# Altium PCB PCB1.PcbDoc
Units mil, origin at the board's own origin, x right, y up, seen from the top; angles counter-clockwise.
Board outline 4001.92 x 2495 mil, 2 copper layers (Top Layer, Bottom Layer); 22 components, 41 nets, 120 pads, 943 vias.
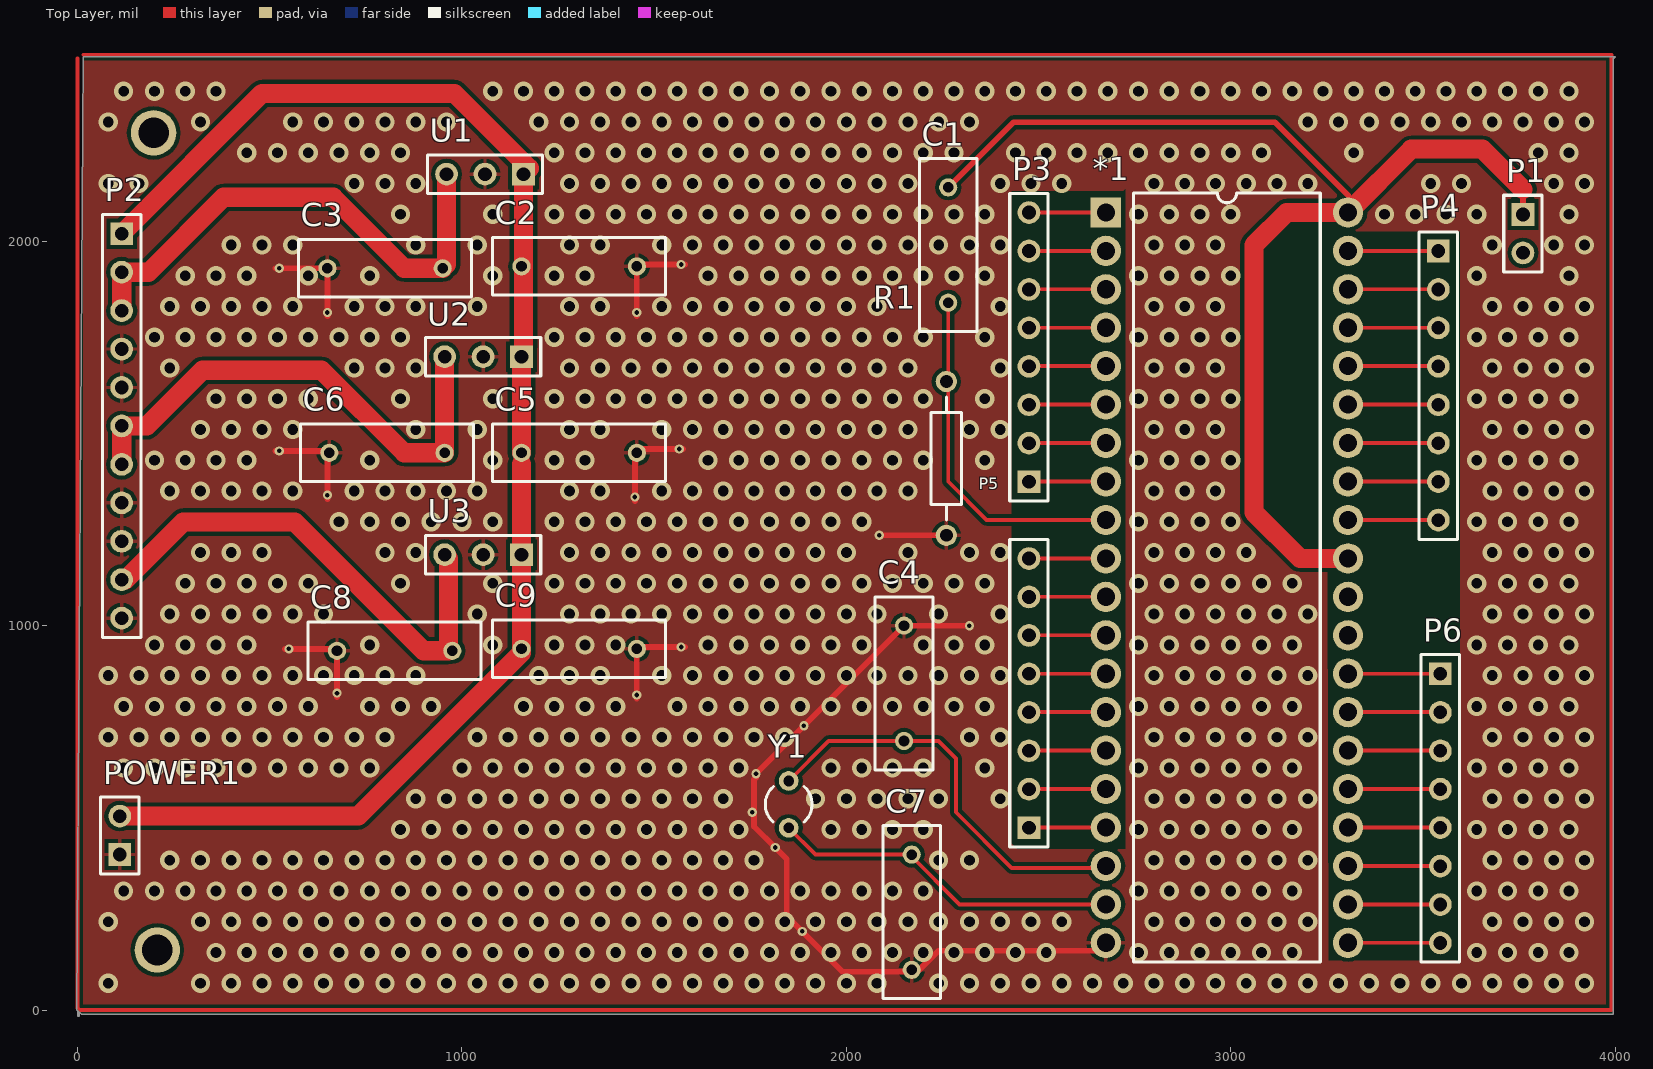
[diagram p0: Top Layer view]
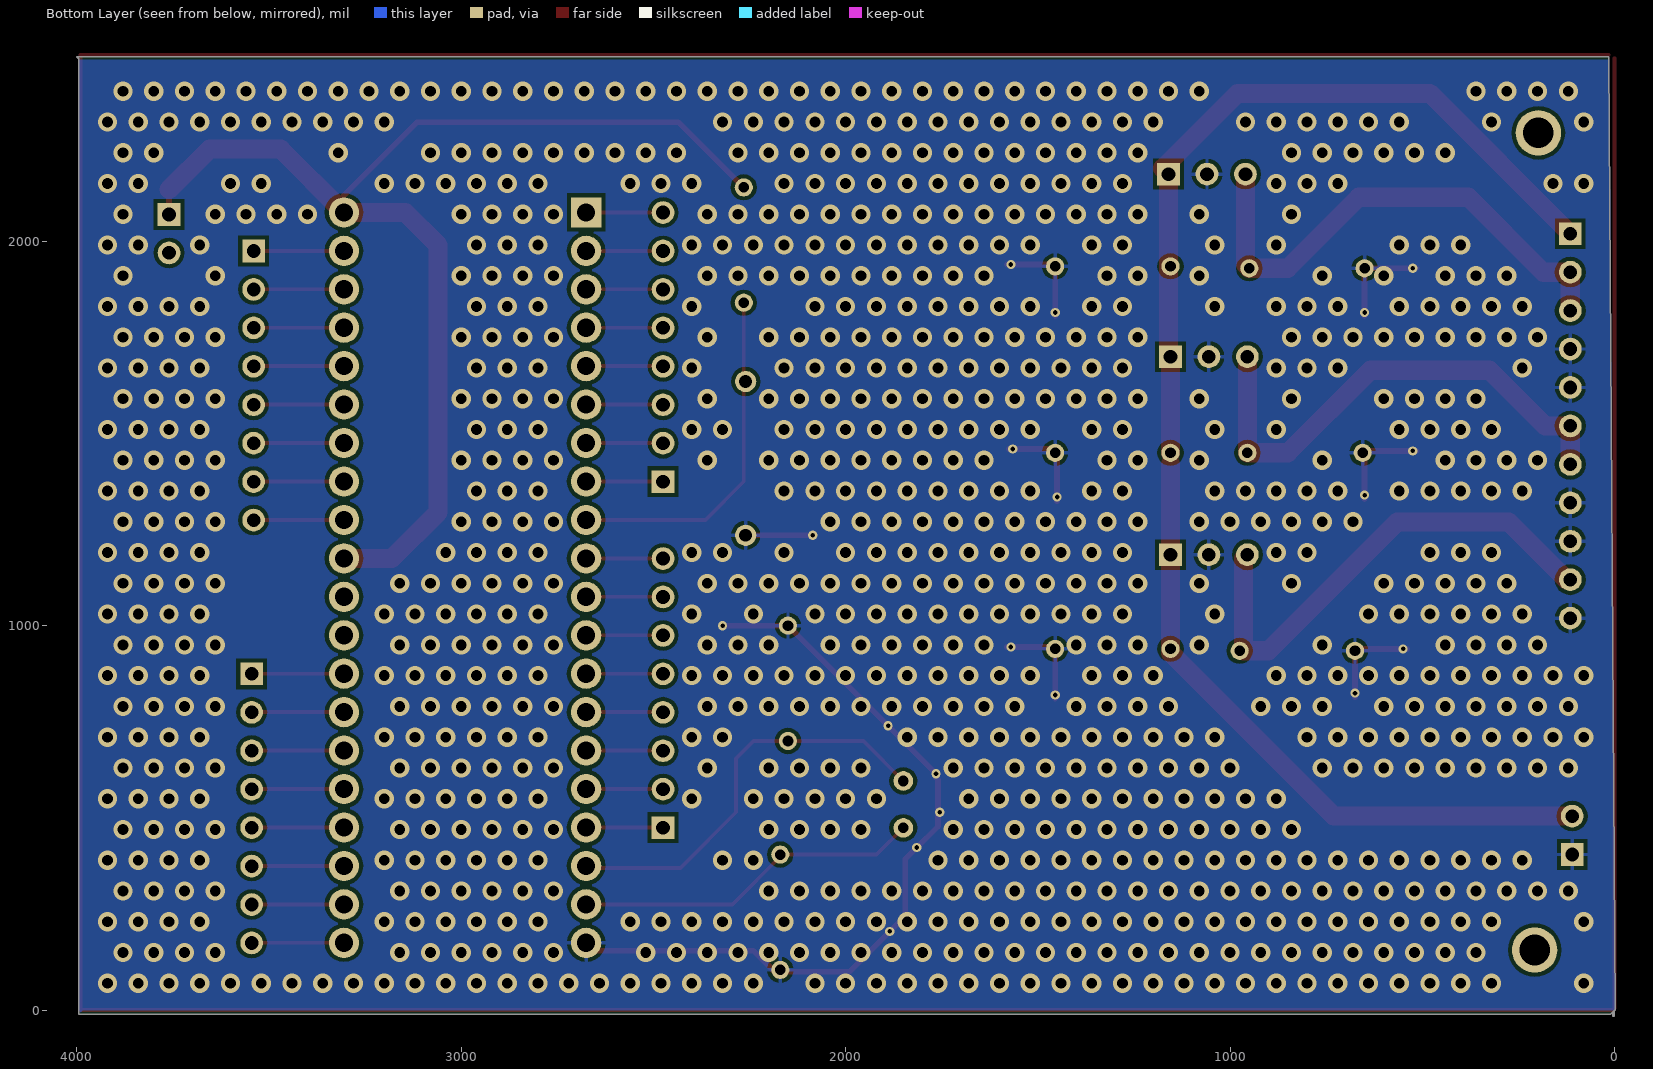
[diagram p1: Bottom Layer view, seen from below]

## Layer stack, top to bottom
Top Solder: solder mask 0.4, Solder Resist, Dk 3.5
Top Layer: signal copper 1.4
Dielectric 1: dielectric 12.6, FR-4, Dk 4.8
Bottom Layer: signal copper 1.4
Bottom Solder: solder mask 0.4, Solder Resist, Dk 3.5

## Board outline
15,2480 4000,2480 3995,2475 3995,-10 10,-10 0,0 5,-5 5,-15 0,-15 0,-1.12 -1.92,0.79
board region "Layer Stack Region 1": 0,-14.62 0,-1.12 -1.92,0.79 15,2480 4000,2480 3995,2475 3995,-10 10,-10 0,0 5,-5 5,-14.62
board region "Layer Stack Region 1": 5,-14.62 5,-15 0,-15 0,-14.62

## Design rules (kind name [scope] priority, off if disabled: settings)
Clearance [All] p1: gap=10
PolygonConnect PolygonConnect_1 [IsVia] p1: connectstyle=Direct reliefconductorwidth=10 reliefentries=4 polygonreliefangle="90 Angle" airgapwidth=10
PolygonConnect [All] p2: connectstyle=Relief reliefconductorwidth=10 reliefentries=4 polygonreliefangle="90 Angle" airgapwidth=10
RoutingVias [All] p1: holewidth=28 width=50 viastyle="Through Hole" minholewidth=28 minwidth=50 maxholewidth=28 maxwidth=50
SilkToSolderMaskClearance [IsPad] p1: minsilkscreentomaskgap=0 clearancetoexposedcopper=TRUE
SolderMaskExpansion [All] p1: expansion=4
Width POWER [InNetClass('POWER')] p1: maxlimit=60 minlimit=15 preferedwidth=20
Width [All] p2: maxlimit=10 minlimit=10 preferedwidth=10
29 further rules are at their usual default settings.

## Classes and differential pairs
net class POWER: 5V1 5V2 6V GND NetC2_2 VCC

## Components (designator, comment, footprint, x,y, rotation, side; value= is the part's Value field where it differs from the comment)
*1 "89C51" 98C52 2675,2075.43 r0 top
C1 "" RAD-0.3 2265,1990.43 r90 top
C2 "Cap" RAD-0.3 1305,1935 r180 top
C3 "Cap" RAD-0.3 800,1930 r0 top
C4 "" RAD-0.3 2150,850.43 r90 top
C5 "Cap" RAD-0.3 1305,1450 r180 top
C6 "Cap" RAD-0.3 805,1450 r0 top
C7 "" RAD-0.3 2170,255 r270 top
C8 "Cap" RAD-0.3 825,935 r0 top
C9 "Cap" RAD-0.3 1305,940 r180 top
P1 "Header 2" HDR1X2 3760,2070 r270 top
P2 "Header 11" HDR1X11 115,2020 r270 top
P3 "Header 8" HDR1X8 2475,1375 r90 top
P4 "Header 8" HDR1X8 3540,1975 r270 top
P5 "Header 8" HDR1X8 2475,475 r90 top
P6 "Header 8" HDR1X8 3545,875 r270 top
POWER1 "Header 2" HDR1X2 110,405 r90 top
R1 "Res2" AXIAL-0.4 2260,1435.43 r90 top
U1 "Component_1" HDR1X3 1160,2175 r180 top
U2 "Component_1" HDR1X3 1155,1700 r180 top
U3 "Component_1" HDR1X3 1155,1185 r180 top
Y1 "XTAL" R38 1850,535.43 r180 top

## Footprints (in the part's own frame and the unit in brackets; to place one, negate y for a bottom-side part, rotate by r counter-clockwise, add the part's x,y. Pads: shape width x height; smd on the part's side, far side on the other; paste and mask are expansions set on the pad)
98C52 [mm]
  rect 2x2 hole 1.2: 1(0,0)
  round 2 hole 1.2: 2(0,-2.54) 3(0,-5.08) 4(0,-7.62) 5(0,-10.16) 6(0,-12.7) 7(0,-15.24) 8(0,-17.78) 9(0,-20.32) 10(0,-22.86) 11(0,-25.4) 12(0,-27.94) 13(0,-30.48) 14(0,-33.02) 15(0,-35.56) 16(0,-38.1) 17(0,-40.64) 18(0,-43.18) 19(0,-45.72) 20(0,-48.26) 21(16,-48.26) 22(16,-45.72) 23(16,-43.18) 24(16,-40.64) 25(16,-38.1) 26(16,-35.56) 27(16,-33.02) 28(16,-30.48) 29(16,-27.94) 30(16,-25.4) 31(16,-22.86) 32(16,-20.32) 33(16,-17.78) 34(16,-15.24) 35(16,-12.7) 36(16,-10.16) 37(16,-7.62) 38(16,-5.08) 39(16,-2.54) 40(16,0)
  silkscreen extent 1.83,-49.53 14.17,1.27, body extent 1.9,-49.4 14.48,1.29, height 1
AXIAL-0.4 [mm] "Axial Device, Thru-Hole; 2 Leads; 0.4 in Pin Spacing"
  round 1.4 hole 0.85: 1(-5.08,0) 2(5.08,0)
  silkscreen extent -4.06,-1.02 4.06,1.02
HDR1X2 [mm] "Connector; Header; 2 Position"
  rect 1.5x1.5 hole 0.9: 1(0,0)
  round 1.5 hole 0.9: 2(2.54,0)
  silkscreen extent -1.27,-1.27 3.81,1.27
HDR1X3 [mm] "Connector; Header; 3 Position"
  rect 1.5x1.5 hole 0.9: 1(0,0)
  round 1.5 hole 0.9: 2(2.54,0) 3(5.08,0)
  silkscreen extent -1.27,-1.27 6.35,1.27
HDR1X8 [mm] "Connector; Header; 8 Position"
  rect 1.5x1.5 hole 0.9: 1(0,0)
  round 1.5 hole 0.9: 2(2.54,0) 3(5.08,0) 4(7.62,0) 5(10.16,0) 6(12.7,0) 7(15.24,0) 8(17.78,0)
  silkscreen extent -1.27,-1.27 19.05,1.27
HDR1X11 [mm] "Connector; Header; 11 Position"
  rect 1.5x1.5 hole 0.9: 1(0,0)
  round 1.5 hole 0.9: 2(2.54,0) 3(5.08,0) 4(7.62,0) 5(10.16,0) 6(12.7,0) 7(15.24,0) 8(17.78,0) 9(20.32,0) 10(22.86,0) 11(25.4,0)
  silkscreen extent -1.27,-1.27 26.67,1.27
R38 [mm] "Crystal, Thru-Hole; 2 Leads; Body 3.1 x 8.2 mm (Dia.xH)"
  round 1.3 hole 0.7: 1(0,1.55) 2(0,-1.55)
  silkscreen extent -1.55,-1.19 1.55,1.17
RAD-0.3 [mm] "Radial Cap, Thru-Hole; 2 Leads; 0.3 in Pin Spacing"
  round 1.2 hole 0.7: 1(-3.81,0) 2(3.81,0)
  silkscreen extent -5.71,-1.91 5.71,1.91

## Part data
*1: library part 85C51
C1 C4 C7: library part Cap, "Capacitor"
C2 C3 C5 C6 C8 C9: "Capacitor"
P1 POWER1: "Header, 2-Pin"
P2: "Header, 11-Pin"
P3 P4 P5 P6: "Header, 8-Pin"
R1: "Resistor"
Y1: "Crystal Oscillator"

## Free pads (board coordinates)
  round 118.11 hole 80: 0(198.11,2282.32) 0(207.54,156.63)

## Via types
v1: diameter 50, hole 28, Top Layer to Bottom Layer, 924 vias
v2: diameter 24, hole 12, Top Layer to Bottom Layer, 14 vias
v3: diameter 24, hole 12, Top Layer to Bottom Layer, tented both sides, 5 vias

## Nets (pads, with @x,y where several pads share a name; then routed paths per layer and width w, separated by ;. In a path a pad name is that pad's centre, name@x,y a point inside that pad or via, vN(x,y) a via of type N, cw(c..) or ccw(c..) an arc to the next point about the centre after c; other vN are vias at no path point)
5V1: C3.2 P2.2 P2.3 U1.3 | length 1327.4
  Top Layer w50: P2.3 P2.2 185,1920 380,2115 665,2115 850,1930 C3.2 ; C3.2@960,1940 U1.3
5V2: C6.2 P2.6 P2.7 U2.3 | length 1339.1
  Top Layer w50: P2.7 P2.6 180,1520 325,1665 635,1665 850,1450 C6.2 U2.3
6V: C8.2 P2.10 U3.3 | length 1305
  Top Layer w50: P2.10 125,1120 275,1270 565,1270 900,935 965,935 965,1175 U3.3
GND: *1.20 C2.1 C3.1 C4.2 C5.1 C6.1 C7.2 C8.1 C9.1 P2.4 P2.5 P2.8 P2.9 P2.11 POWER1.1 R1.1 U1.2 U2.2 U3.2 | length 3689
  Top Layer w15: v2@515,1455 v2(525,1455) C6.1@640,1455 ; v2@515,1930 v2(525,1930) C3.1@640,1930 ; v2@540,940 v2(550,940) C8.1@665,940 ; v2@650,1330 v2(650,1340) C6.1@650,1455 ; v2@650,1805 v2(650,1815) C3.1 ; v2@675,815 v2(675,825) C8.1 C8.1@675,940 ; v2@1450,1325 v2(1450,1335) C5.1@1450,1450 ; C5.1@1450,1460 v2(1565,1460) v2@1575,1460 ; v2@1455,810 v2(1455,820) C9.1@1455,935 ; C9.1@1455,945 v2(1570,945) v2@1580,945 ; v2@1455,1805 v2(1455,1815) C2.1@1455,1930 ; C2.1@1455,1940 v2(1570,1940) v2@1580,1940 ; v2(2085.43,1235.43) R1.1 ; v3(2320,1000) 2149.57,1000 v3(1889.57,740) v3(1765,615.43) 1765,605 1760,600 1760,478.22 v2(1815,423.22) 1845,393.22 1845,245 v3(1885,205) 1990,100 2184.57,100 2239.57,155 *1.20@2654.57,155
  other v1: 80,70.43 320,70.43 400,70.43 480,70.43 560,70.43 640,70.43 720,70.43 800,70.43 880,70.43 960,70.43 1040,70.43 1120,70.43 1200,70.43 1280,70.43 1360,70.43 1440,70.43 1520,70.43 1600,70.43 1680,70.43 1760,70.43 1840,70.43 1920,70.43 2000,70.43 2080,70.43 2240,70.43 2320,70.43 2400,70.43 2480,70.43 2560,70.43 2640,70.43 2720,70.43 2800,70.43 2880,70.43 2960,70.43 3040,70.43 3120,70.43 3200,70.43 3280,70.43 3360,70.43 3440,70.43 3520,70.43 3600,70.43 3680,70.43 3760,70.43 3840,70.43 3920,70.43 360,150.43 440,150.43 520,150.43 600,150.43 680,150.43 760,150.43 840,150.43 920,150.43 1000,150.43 1080,150.43 1160,150.43 1240,150.43 1320,150.43 1400,150.43 1480,150.43 1560,150.43 1640,150.43 1720,150.43 1800,150.43 1880,150.43 1960,150.43 2040,150.43 2120,150.43 2200,150.43 2280,150.43 2360,150.43 2440,150.43 2520,150.43 2760,150.43 2840,150.43 2920,150.43 3000,150.43 3080,150.43 3160,150.43 3640,150.43 3720,150.43 3800,150.43 3880,150.43 80,230.43 320,230.43 400,230.43 480,230.43 560,230.43 640,230.43 720,230.43 800,230.43 880,230.43 960,230.43 1040,230.43 1120,230.43 1200,230.43 1280,230.43 1360,230.43 1440,230.43 1520,230.43 1600,230.43 1680,230.43 1760,230.43 1840,230.43 1920,230.43 2000,230.43 2080,230.43 2160,230.43 2240,230.43 2320,230.43 2400,230.43 2480,230.43 2560,230.43 2800,230.43 2880,230.43 2960,230.43 3040,230.43 3120,230.43 3200,230.43 3680,230.43 3760,230.43 3840,230.43 3920,230.43 120,310.43 200,310.43 280,310.43 360,310.43 440,310.43 520,310.43 600,310.43 680,310.43 760,310.43 840,310.43 920,310.43 1000,310.43 1080,310.43 1160,310.43 1240,310.43 1320,310.43 1400,310.43 1480,310.43 1560,310.43 1640,310.43 1720,310.43 1800,310.43 1880,310.43 1960,310.43 2040,310.43 2120,310.43 2200,310.43 2760,310.43 2840,310.43 2920,310.43 3000,310.43 3080,310.43 3160,310.43 3640,310.43 3720,310.43 3800,310.43 3880,310.43 240,390.43 320,390.43 400,390.43 480,390.43 560,390.43 640,390.43 720,390.43 800,390.43 880,390.43 960,390.43 1040,390.43 1120,390.43 1200,390.43 1280,390.43 1360,390.43 1440,390.43 1520,390.43 1600,390.43 1680,390.43 1760,390.43 2240,390.43 2320,390.43 2800,390.43 2880,390.43 2960,390.43 3040,390.43 3120,390.43 3200,390.43 3680,390.43 3760,390.43 3840,390.43 3920,390.43 840,470.43 920,470.43 1000,470.43 1080,470.43 1160,470.43 1240,470.43 1320,470.43 1400,470.43 1480,470.43 1560,470.43 1640,470.43 1720,470.43 1960,470.43 2040,470.43 2120,470.43 2200,470.43 2760,470.43 2840,470.43 2920,470.43 3000,470.43 3080,470.43 3160,470.43 3640,470.43 3720,470.43 3800,470.43 3880,470.43 880,550.43 960,550.43 1040,550.43 1120,550.43 1200,550.43 1280,550.43 1360,550.43 1440,550.43 1520,550.43 1600,550.43 1680,550.43 1920,550.43 2000,550.43 2080,550.43 2160,550.43 2240,550.43 2400,550.43 2800,550.43 2880,550.43 2960,550.43 3040,550.43 3120,550.43 3200,550.43 3680,550.43 3760,550.43 3840,550.43 3920,550.43 120,630.43 200,630.43 280,630.43 360,630.43 440,630.43 520,630.43 600,630.43 680,630.43 760,630.43 1000,630.43 1080,630.43 1160,630.43 1240,630.43 1320,630.43 1400,630.43 1480,630.43 1560,630.43 1640,630.43 1720,630.43 1960,630.43 2040,630.43 2120,630.43 2200,630.43 2360,630.43 2760,630.43 2840,630.43 2920,630.43 3000,630.43 3080,630.43 3160,630.43 3640,630.43 3720,630.43 3800,630.43 3880,630.43 80,710.43 160,710.43 240,710.43 320,710.43 400,710.43 480,710.43 560,710.43 640,710.43 720,710.43 800,710.43 1040,710.43 1120,710.43 1200,710.43 1280,710.43 1360,710.43 1440,710.43 1520,710.43 1600,710.43 1680,710.43 1760,710.43 1840,710.43 2320,710.43 2400,710.43 2800,710.43 2880,710.43 2960,710.43 3040,710.43 3120,710.43 3200,710.43 3680,710.43 3760,710.43 3840,710.43 3920,710.43 120,790.43 200,790.43 280,790.43 360,790.43 440,790.43 520,790.43 600,790.43 760,790.43 840,790.43 920,790.43 1160,790.43 1240,790.43 1320,790.43 1400,790.43 1560,790.43 1640,790.43 1720,790.43 1800,790.43 1880,790.43 1960,790.43 2040,790.43 2120,790.43 2200,790.43 2280,790.43 2360,790.43 2760,790.43 2840,790.43 2920,790.43 3000,790.43 3080,790.43 3160,790.43 3640,790.43 3720,790.43 3800,790.43 3880,790.43 80,870.43 160,870.43 240,870.43 320,870.43 400,870.43 480,870.43 560,870.43 640,870.43 720,870.43 800,870.43 880,870.43 1200,870.43 1280,870.43 1360,870.43 1520,870.43 1600,870.43 1680,870.43 1760,870.43 1840,870.43 1920,870.43 2000,870.43 2080,870.43 2160,870.43 2240,870.43 2320,870.43 2400,870.43 2800,870.43 2880,870.43 2960,870.43 3040,870.43 3120,870.43 3200,870.43 3680,870.43 3760,870.43 3840,870.43 3920,870.43 200,950.43 280,950.43 360,950.43 440,950.43 760,950.43 1080,950.43 1240,950.43 1320,950.43 1400,950.43 1640,950.43 1720,950.43 1800,950.43 1880,950.43 1960,950.43 2040,950.43 2200,950.43 2280,950.43 2360,950.43 2760,950.43 2840,950.43 2920,950.43 3000,950.43 3080,950.43 3160,950.43 3640,950.43 3720,950.43 3800,950.43 3880,950.43 240,1030.43 320,1030.43 400,1030.43 480,1030.43 560,1030.43 640,1030.43 1040,1030.43 1280,1030.43 1360,1030.43 1440,1030.43 1520,1030.43 1600,1030.43 1680,1030.43 1760,1030.43 1840,1030.43 1920,1030.43 2000,1030.43 2080,1030.43 2240,1030.43 2400,1030.43 2800,1030.43 2880,1030.43 2960,1030.43 3040,1030.43 3120,1030.43 3200,1030.43 3680,1030.43 3760,1030.43 3840,1030.43 3920,1030.43 280,1110.43 360,1110.43 440,1110.43 520,1110.43 600,1110.43 840,1110.43 1080,1110.43 1240,1110.43 1320,1110.43 1400,1110.43 1480,1110.43 1560,1110.43 1640,1110.43 1720,1110.43 1800,1110.43 1880,1110.43 1960,1110.43 2040,1110.43 2120,1110.43 2200,1110.43 2280,1110.43 2360,1110.43 2760,1110.43 2840,1110.43 2920,1110.43 3000,1110.43 3080,1110.43 3160,1110.43 3640,1110.43 3720,1110.43 3800,1110.43 3880,1110.43 320,1190.43 400,1190.43 480,1190.43 800,1190.43 880,1190.43 1280,1190.43 1360,1190.43 1440,1190.43 1520,1190.43 1600,1190.43 1680,1190.43 1760,1190.43 1840,1190.43 1920,1190.43 2000,1190.43 2160,1190.43 2320,1190.43 2400,1190.43 2800,1190.43 2880,1190.43 2960,1190.43 3040,1190.43 3680,1190.43 3760,1190.43 3840,1190.43 3920,1190.43 680,1270.43 760,1270.43 840,1270.43 920,1270.43 1000,1270.43 1080,1270.43 1240,1270.43 1320,1270.43 1400,1270.43 1480,1270.43 1560,1270.43 1640,1270.43 1720,1270.43 1800,1270.43 1880,1270.43 1960,1270.43 2040,1270.43 2760,1270.43 2840,1270.43 2920,1270.43 3000,1270.43 3640,1270.43 3720,1270.43 3800,1270.43 3880,1270.43 240,1350.43 320,1350.43 400,1350.43 480,1350.43 560,1350.43 720,1350.43 800,1350.43 880,1350.43 960,1350.43 1040,1350.43 1280,1350.43 1360,1350.43 1520,1350.43 1600,1350.43 1680,1350.43 1760,1350.43 1840,1350.43 1920,1350.43 2000,1350.43 2080,1350.43 2160,1350.43 2800,1350.43 2880,1350.43 2960,1350.43 3680,1350.43 3760,1350.43 3840,1350.43 3920,1350.43 200,1430.43 280,1430.43 360,1430.43 440,1430.43 760,1430.43 1080,1430.43 1240,1430.43 1320,1430.43 1640,1430.43 1720,1430.43 1800,1430.43 1880,1430.43 1960,1430.43 2040,1430.43 2120,1430.43 2200,1430.43 2360,1430.43 2760,1430.43 2840,1430.43 2920,1430.43 3000,1430.43 3640,1430.43 3720,1430.43 3800,1430.43 3880,1430.43 320,1510.43 400,1510.43 480,1510.43 560,1510.43 880,1510.43 1040,1510.43 1280,1510.43 1360,1510.43 1520,1510.43 1600,1510.43 1680,1510.43 1760,1510.43 1840,1510.43 1920,1510.43 2000,1510.43 2080,1510.43 2160,1510.43 2320,1510.43 2400,1510.43 2800,1510.43 2880,1510.43 2960,1510.43 3680,1510.43 3760,1510.43 3840,1510.43 3920,1510.43 360,1590.43 440,1590.43 520,1590.43 600,1590.43 840,1590.43 1080,1590.43 1240,1590.43 1320,1590.43 1400,1590.43 1480,1590.43 1560,1590.43 1640,1590.43 1720,1590.43 1800,1590.43 1880,1590.43 1960,1590.43 2040,1590.43 2120,1590.43 2200,1590.43 2360,1590.43 2760,1590.43 2840,1590.43 2920,1590.43 3000,1590.43 3640,1590.43 3720,1590.43 3800,1590.43 3880,1590.43 240,1670.43 720,1670.43 800,1670.43 880,1670.43 1280,1670.43 1360,1670.43 1440,1670.43 1520,1670.43 1600,1670.43 1680,1670.43 1760,1670.43 1840,1670.43 1920,1670.43 2000,1670.43 2080,1670.43 2160,1670.43 2400,1670.43 2800,1670.43 2880,1670.43 2960,1670.43 3680,1670.43 3760,1670.43 3840,1670.43 3920,1670.43 200,1750.43 280,1750.43 360,1750.43 440,1750.43 520,1750.43 600,1750.43 680,1750.43 760,1750.43 840,1750.43 1240,1750.43 1320,1750.43 1400,1750.43 1480,1750.43 1560,1750.43 1640,1750.43 1720,1750.43 1800,1750.43 1880,1750.43 1960,1750.43 2040,1750.43 2120,1750.43 2200,1750.43 2360,1750.43 2760,1750.43 2840,1750.43 2920,1750.43 3000,1750.43 3640,1750.43 3720,1750.43 3800,1750.43 3880,1750.43 240,1830.43 320,1830.43 400,1830.43 480,1830.43 560,1830.43 720,1830.43 800,1830.43 880,1830.43 1040,1830.43 1280,1830.43 1360,1830.43 1520,1830.43 1600,1830.43 1680,1830.43 1760,1830.43 1840,1830.43 1920,1830.43 2000,1830.43 2080,1830.43 2400,1830.43 2800,1830.43 2880,1830.43 2960,1830.43 3680,1830.43 3760,1830.43 3840,1830.43 3920,1830.43 280,1910.43 360,1910.43 440,1910.43 600,1910.43 760,1910.43 1080,1910.43 1240,1910.43 1320,1910.43 1640,1910.43 1720,1910.43 1800,1910.43 1880,1910.43 1960,1910.43 2040,1910.43 2120,1910.43 2200,1910.43 2280,1910.43 2360,1910.43 2760,1910.43 2840,1910.43 2920,1910.43 3000,1910.43 3640,1910.43 3880,1910.43 400,1990.43 480,1990.43 560,1990.43 880,1990.43 1040,1990.43 1280,1990.43 1360,1990.43 1520,1990.43 1600,1990.43 1680,1990.43 1760,1990.43 1840,1990.43 1920,1990.43 2000,1990.43 2080,1990.43 2160,1990.43 2240,1990.43 2320,1990.43 2400,1990.43 2800,1990.43 2880,1990.43 2960,1990.43 3680,1990.43 3840,1990.43 3920,1990.43 840,2070.43 1080,2070.43 1240,2070.43 1320,2070.43 1400,2070.43 1480,2070.43 1560,2070.43 1640,2070.43 1720,2070.43 1800,2070.43 1880,2070.43 1960,2070.43 2040,2070.43 2120,2070.43 2200,2070.43 2280,2070.43 2360,2070.43 2760,2070.43 2840,2070.43 2920,2070.43 3000,2070.43 3400,2070.43 3480,2070.43 3560,2070.43 3640,2070.43 3880,2070.43 80,2150.43 160,2150.43 720,2150.43 800,2150.43 880,2150.43 1280,2150.43 1360,2150.43 1440,2150.43 1520,2150.43 1600,2150.43 1680,2150.43 1760,2150.43 1840,2150.43 1920,2150.43 2000,2150.43 2080,2150.43 2160,2150.43 2400,2150.43 2480,2150.43 2560,2150.43 2800,2150.43 2880,2150.43 2960,2150.43 3040,2150.43 3120,2150.43 3200,2150.43 3520,2150.43 3600,2150.43 3840,2150.43 3920,2150.43 440,2230.43 520,2230.43 600,2230.43 680,2230.43 760,2230.43 840,2230.43 1240,2230.43 1320,2230.43 1400,2230.43 1480,2230.43 1560,2230.43 1640,2230.43 1720,2230.43 1800,2230.43 1880,2230.43 1960,2230.43 2040,2230.43 2120,2230.43 2200,2230.43 2280,2230.43 2440,2230.43 2520,2230.43 2600,2230.43 2680,2230.43 2760,2230.43 2840,2230.43 2920,2230.43 3000,2230.43 3080,2230.43 3320,2230.43 3800,2230.43 3880,2230.43 80,2310.43 320,2310.43 560,2310.43 640,2310.43 720,2310.43 800,2310.43 880,2310.43 960,2310.43 1200,2310.43 1280,2310.43 1360,2310.43 1440,2310.43 1520,2310.43 1600,2310.43 1680,2310.43 1760,2310.43 1840,2310.43 1920,2310.43 2000,2310.43 2080,2310.43 2160,2310.43 2240,2310.43 2320,2310.43 3200,2310.43 3280,2310.43 3360,2310.43 3440,2310.43 3520,2310.43 3600,2310.43 3680,2310.43 3760,2310.43 3840,2310.43 3920,2310.43 120,2390.43 200,2390.43 280,2390.43 360,2390.43 1080,2390.43 1160,2390.43 1240,2390.43 1320,2390.43 1400,2390.43 1480,2390.43 1560,2390.43 1640,2390.43 1720,2390.43 1800,2390.43 1880,2390.43 1960,2390.43 2040,2390.43 2120,2390.43 2200,2390.43 2280,2390.43 2360,2390.43 2440,2390.43 2520,2390.43 2600,2390.43 2680,2390.43 2760,2390.43 2840,2390.43 2920,2390.43 3000,2390.43 3080,2390.43 3160,2390.43 3240,2390.43 3320,2390.43 3400,2390.43 3480,2390.43 3560,2390.43 3640,2390.43 3720,2390.43 3800,2390.43 3880,2390.43
  other v3: 1755,515
Net*1_1: *1.1 P3.8 | length 199.6
  Top Layer w10: P3.8@2475.43,2075.43 *1.1
Net*1_2: *1.2 P3.7 | length 200.2
  Top Layer w10: P3.7 2475.43,1975.43 *1.2
Net*1_3: *1.3 P3.6 | length 199.6
  Top Layer w10: P3.6@2475.43,1875.43 *1.3
Net*1_4: *1.4 P3.5 | length 204.6
  Top Layer w10: P3.5@2475.43,1775.43 *1.4
  Bottom Layer w10: P3.5@2485,1770.43 P3.5@2485,1775.43
Net*1_5: *1.5 P3.4 | length 199.6
  Top Layer w10: P3.4@2475.43,1675.43 *1.5
Net*1_6: *1.6 P3.3 | length 204.6
  Top Layer w10: P3.3@2475.43,1575.43 *1.6
  Bottom Layer w10: P3.3@2485,1570.43 P3.3@2485,1575.43
Net*1_7: *1.7 P3.2 | length 206.6
  Top Layer w10: P3.2@2475.43,1475.43 *1.7
  Bottom Layer w10: *1.7@2670,1470.43 *1.7
Net*1_8: *1.8 P3.1 | length 199.6
  Top Layer w10: P3.1@2475.43,1375.43 *1.8
Net*1_9: *1.9 C1.1 R1.2 | length 916.7
  Top Layer w10: C1.1 2265,1375 2364.57,1275.43 *1.9
Net*1_10: *1.10 P5.8 | length 199.6
  Top Layer w10: P5.8@2475.43,1175.43 *1.10
Net*1_11: *1.11 P5.7 | length 199.6
  Top Layer w10: P5.7@2475.43,1075.43 *1.11
Net*1_12: *1.12 P5.6 | length 204.6
  Top Layer w10: P5.6@2475.43,975.43 *1.12
  Bottom Layer w10: P5.6@2475,970.43 P5.6@2475,975.43
Net*1_13: *1.13 P5.5 | length 199.6
  Top Layer w10: P5.5@2475.43,875.43 *1.13
Net*1_14: *1.14 P5.4 | length 199.6
  Top Layer w10: P5.4@2475.43,775.43 *1.14
Net*1_15: *1.15 P5.3 | length 204.6
  Top Layer w10: P5.3@2475.43,675.43 *1.15
  Bottom Layer w10: P5.3@2475,670.43 P5.3@2475,675.43
Net*1_16: *1.16 P5.2 | length 199.6
  Top Layer w10: P5.2@2475.43,575.43 *1.16
Net*1_17: *1.17 P5.1 | length 206.6
  Top Layer w10: P5.1@2475.43,475.43 *1.17
  Bottom Layer w10: *1.17@2670,470.43 *1.17
Net*1_18: *1.18 C4.1 Y1.2 | length 1089.2
  Top Layer w10: Y1.2 1953.98,700.43 C4.1 2239.57,700.43 2285,655 2285,515 2430,370 2669.57,370 *1.18
Net*1_19: *1.19 C7.1 Y1.1 | length 907.4
  Top Layer w10: Y1.1 1919.4,405 2165,405 2294.57,275.43 *1.19
Net*1_21: *1.21 P6.8 | length 239.6
  Top Layer w10: *1.21 P6.8@3544.57,175.43
Net*1_22: *1.22 P6.7 | length 239.6
  Top Layer w10: *1.22 P6.7@3544.57,275.43
Net*1_23: *1.23 P6.6 | length 239.6
  Top Layer w10: *1.23 P6.6@3544.57,375.43
Net*1_24: *1.24 P6.5 | length 239.6
  Top Layer w10: *1.24 P6.5@3544.57,475.43
Net*1_25: *1.25 P6.4 | length 239.6
  Top Layer w10: *1.25 P6.4@3544.57,575.43
Net*1_26: *1.26 P6.3 | length 239.6
  Top Layer w10: *1.26 P6.3@3544.57,675.43
Net*1_27: *1.27 P6.2 | length 239.6
  Top Layer w10: *1.27 P6.2@3544.57,775.43
Net*1_28: *1.28 P6.1 | length 239.6
  Top Layer w10: *1.28 P6.1@3544.57,875.43
Net*1_32: *1.32 P4.8 | length 234.6
  Top Layer w10: *1.32 P4.8@3539.57,1275.43
Net*1_33: *1.33 P4.7 | length 234.6
  Top Layer w10: *1.33 P4.7@3539.57,1375.43
Net*1_34: *1.34 P4.6 | length 234.6
  Top Layer w10: *1.34 P4.6@3539.57,1475.43
Net*1_35: *1.35 P4.5 | length 235.3
  Top Layer w10: *1.35 3539.57,1575.43 P4.5
Net*1_36: *1.36 P4.4 | length 234.6
  Top Layer w10: *1.36 P4.4@3539.57,1675.43
Net*1_37: *1.37 P4.3 | length 234.6
  Top Layer w10: *1.37 P4.3@3539.57,1775.43
Net*1_38: *1.38 P4.2 | length 248.8
  Top Layer w10: *1.38 3539.57,1875.43 P4.2
  Bottom Layer w10: P4.2@3530.43,1870.43 P4.2@3540,1880
Net*1_39: *1.39 P4.1 | length 234.6
  Top Layer w10: *1.39 P4.1@3539.57,1975.43
NetC2_2: C2.2 C5.2 C9.2 P2.1 POWER1.2 U1.1 U2.1 U3.1 | length 3682.1
  Top Layer w50: POWER1.2 730,505 C9.2@1150,925 ; P2.1 480,2385 980,2385 1175,2190 U1.1 U2.1@1160,1725 ; C9.2@1155,930 C9.2 U3.1@1155,1170 ; U3.1 1155,1420 ; C5.2 U2.1@1155,1680
VCC: *1.31 *1.40 C1.2 P1.1 | length 3099.8
  Top Layer w15: C1.2@2265.43,2140.43 C1.2 2434.57,2310 3115,2310 3304.92,2120.08 ; P1.1 3760,2135
  Top Layer w50: *1.31 3180,1175.43 3060.43,1295 3060.43,1990.43 3145.43,2075.43 *1.40 3469.49,2240 3655,2240 3760,2135
  Bottom Layer w50: *1.40 *1.40@3304.92,2085.08
pads on no net: *1.29 *1.30 P1.2
copper on no net: | length 12922.1
  Top Layer w10: 0,2475.44 0,5.44 5,0.44 3990,0.44 3990,2485.44 15,2485.44

## Polygon pours and split planes (outlines as drawn)
GND on Top Layer "Top Layer-No Net" (solid, remove dead copper, pour order 11): 15,2480 17.5,2477.5 3997.5,2477.5 3997.5,7.95 3990,0.44 3985,5.44 0,5.44
GND on Bottom Layer "Top Layer-No Net" (solid, remove dead copper, pour order 11): 14.04,2474.39 16.54,2471.89 3996.54,2471.89 3996.54,2.34 3989.04,-5.16 3984.04,-0.16 -0.96,-0.16

## Other copper
Top Layer:
  pour cut-out: 2430,2130 2720,2130 2725,2135 2725,420 2445,420 2430,435
  pour cut-out: 3250,2025 3595,2025 3595,123.91 3593.04,121.96 3585,130 3255,130